# Altium PCB Pcb_mppt_board.PcbDoc
Units mm, origin at the board's own origin, x right, y up, seen from the top; angles counter-clockwise.
Board outline 100 x 98 mm, 2 copper layers (Top Layer, Bottom Layer); 7 components, 3 nets, 40 pads, 221 vias.
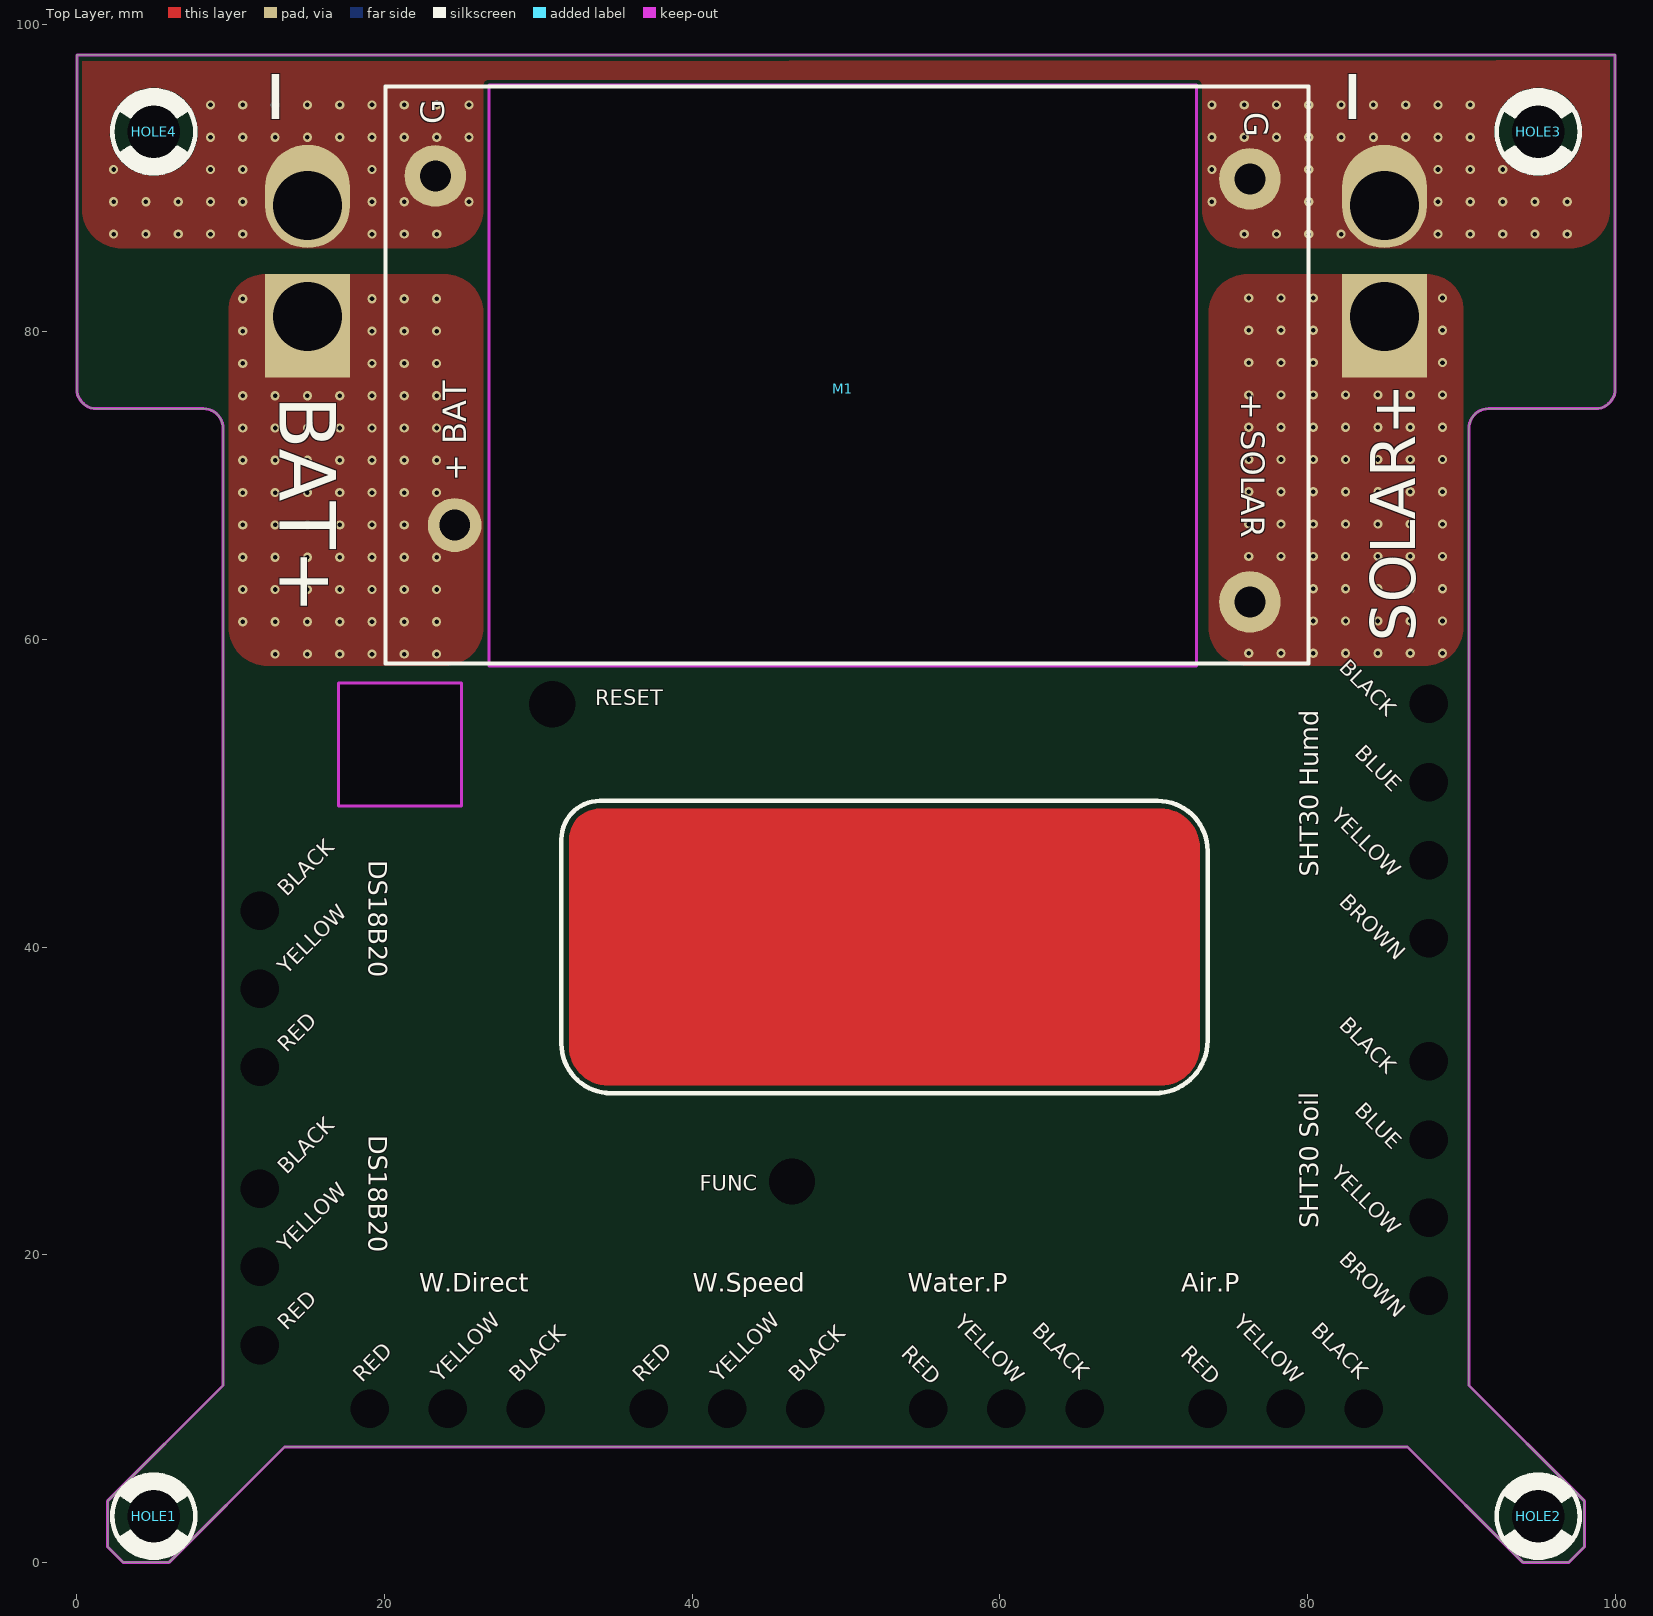
[diagram p0: Top Layer view]
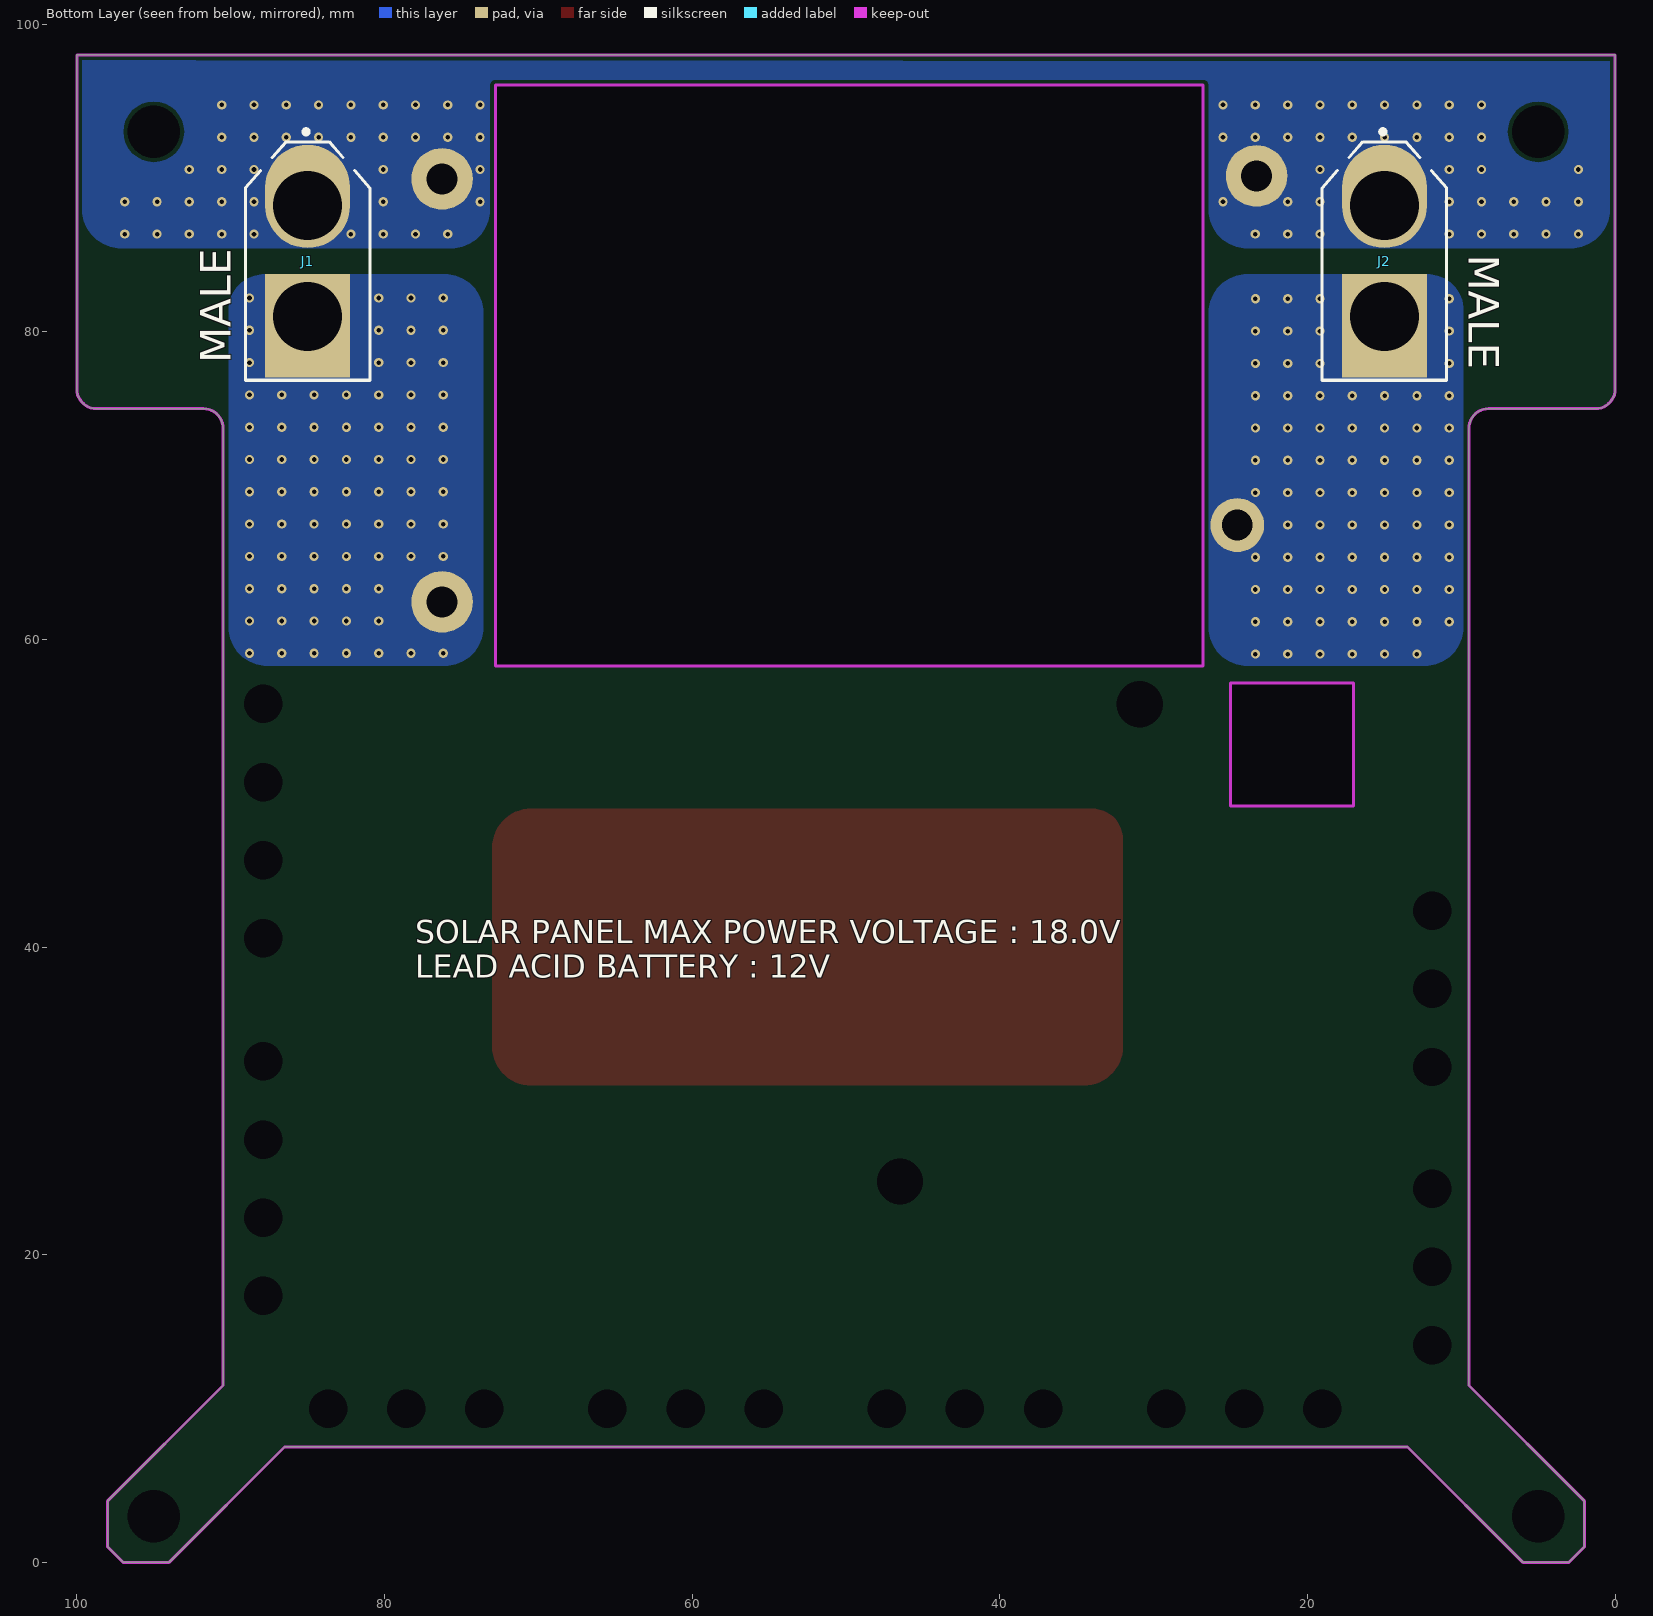
[diagram p1: Bottom Layer view, seen from below]

## Layer stack, top to bottom
Top Solder: solder mask 0.0102, Solder Resist, Dk 3.5
Top Layer: signal copper 0.0356
Dielectric 1: dielectric 0.32, FR-4, Dk 4.8
Bottom Layer: signal copper 0.0356
Bottom Solder: solder mask 0.0102, Solder Resist, Dk 3.5

## Board outline
2,1 3,0 6,0 13.5,7.5 86.5,7.5 94,0 97,0 98,1 98,4 90.5,11.5 90.5,73.73 cw(c91.77,73.73) 91.77,75 98.73,75 ccw(c98.73,76.27) 100,76.27 100,98 0,98 0,76.27 ccw(c1.27,76.27) 1.27,75 8.23,75 cw(c8.23,73.73) 9.5,73.73 9.5,11.5 2,4
cut-out: 17.002,57.165 17.002,49.165 25.002,49.165 25.002,57.165
cut-out: 26.786,96.032 26.786,58.282 72.786,58.282 72.786,96.032

## Design rules (kind name [scope] priority, off if disabled: settings)
Clearance [All] p1: gap=0.254 ignorepadtopadclearanceinfootprint=FALSE except(0: Arc-Hole Track-Hole SMDPad-Hole THPad-Hole Via-Hole Fill-Hole Poly-Hole Region-Hole Text-Hole)
PolygonConnect [All] p1: connectstyle=Direct reliefconductorwidth=0.254 reliefentries=4 polygonreliefangle="90 Angle" airgapwidth=0.254
RoutingVias [All] p1: holewidth=0.3 width=0.3 viastyle="Through Hole" minholewidth=0.3 minwidth=0.3 maxholewidth=0.3 maxwidth=0.3
SolderMaskExpansion [All] p1: expansion=0.102
Width [All] p1: maxlimit=0.254 minlimit=0.254 preferedwidth=0.254
30 further rules are at their usual default settings.

## Classes and differential pairs
component class Sch_mppt_board: J1 J2

## Components (designator, comment, footprint, x,y, rotation, side; value= is the part's Value field where it differs from the comment)
HOLE1 "HOLE" "HOLE M3" 5,3 r0 top
HOLE2 "HOLE" "HOLE M3" 95,3 r0 top
HOLE3 "HOLE" "HOLE M3" 95,93 r0 top
HOLE4 "HOLE" "HOLE M3" 5,93 r0 top
J1 "XT60-M" XT60-M 85,84.6 r270 bottom
J2 "XT60-M" XT60-M 15,84.6 r270 bottom
M1 "MPPT 5A Module" "MODULE MPPT 5A BQ24650" 49.786,76.282 r180 top

## Footprints (in the part's own frame and the unit in brackets; to place one, negate y for a bottom-side part, rotate by r counter-clockwise, add the part's x,y. Pads: shape width x height; smd on the part's side, far side on the other; paste and mask are expansions set on the pad)
"HOLE M3" [mm]
  round 3.2 hole 3.4 mask+0.1: 1(0,0)
  Top Layer pour cut-out: -2.846,0.006 -2.628,1.101 -2.007,2.029 -1.077,2.646 0.019,2.859 0.019,2.859 1.117,2.635 2.042,2.003 2.649,1.062 2.845,-0.041 2.845,-0.041 2.628,-1.12 2.013,-2.033 1.094,-2.64 0.012,-2.845 0.012,-2.845 -1.086,-2.638 -2.017,-2.021 -2.636,-1.091 -2.846,0.006
  silkscreen extent -2.7,-2.7 2.7,2.7, body extent -2.5,-2.5 2.5,2.5, height 1.73
"MODULE MPPT 5A BQ24650" [mm]
  round 4 hole 2: 1(-26.475,13.848) 2(-26.475,-13.652) 4(26.475,-13.848)
  round 3.5 hole 2: 3(25.225,8.852)
  Keep-Out Layer lines w0.2: 23,18 23,-19.75 -23,-19.75 -23,18 23,18
  silkscreen extent -30.27,-19.65 29.73,17.85, body extent -30.28,-19.66 29.72,17.83, height 2.73
XT60-M [mm]
  oval 6.716x5.516 hole 4.5 copper offset -0.6,0: 1(-3.6,0)
  rect 6.716x5.516 hole 4.5 copper offset 0.6,0: 2(3.6,0)
  silkscreen extent -8.55,-4.05 7.75,4.05, body extent -8,-3.99 8,4.01, height 16.1

## Part data
HOLE1 HOLE2 HOLE3 HOLE4: library part "HOLE M3"
J1 J2: Package="Package Analog Devices", Availability=Unavailable, MF=AMASS, MP=XT60-M, Price=None, SnapEDA_Link=https://www.snapeda.com/parts/XT60-M/AMASS/view-part/?ref=snap
M1: library part "Module BQ24650 MPPT 5A", "Module Solar Charge MPPT 5A"

## Free pads (board coordinates)
  round 0 hole 2.5: 2(11.88,14.123) 2(11.88,19.203) 2(11.88,24.283) 2(11.88,32.203) 2(11.88,37.283) 2(11.88,42.363) 2(19.028,10) 2(24.108,10) 2(29.188,10) 2(37.188,10) 2(42.268,10) 2(47.348,10) 2(55.348,10) 2(60.428,10) 2(65.508,10) 2(73.508,10) 2(78.588,10) 2(83.668,10) 2(87.88,17.324) 2(87.88,22.404) 2(87.88,27.484) 2(87.88,32.564) 2(87.88,40.564) 2(87.88,45.644) 2(87.88,50.724) 2(87.88,55.804)
  round 0 hole 3: 2(30.908,55.789) 2(46.5,24.75)

## Via types
v1: diameter 0.6, hole 0.3, Top Layer to Bottom Layer, tented both sides, 221 vias

## Nets (pads, with @x,y where several pads share a name; then routed paths per layer and width w, separated by ;. In a path a pad name is that pad's centre, name@x,y a point inside that pad or via, vN(x,y) a via of type N, cw(c..) or ccw(c..) an arc to the next point about the centre after c; other vN are vias at no path point)
NetJ1_1: J1.1 J2.1 M1.2 M1.4
  other v1: 2.388,86.35 4.488,86.35 6.588,86.35 8.688,86.35 10.788,86.35 19.188,86.35 21.288,86.35 23.388,86.35 75.888,86.35 77.988,86.35 80.088,86.35 82.188,86.35 88.488,86.35 90.588,86.35 92.688,86.35 94.788,86.35 96.888,86.35 2.388,88.45 4.488,88.45 6.588,88.45 8.688,88.45 10.788,88.45 19.188,88.45 21.288,88.45 25.488,88.45 73.788,88.45 80.088,88.45 88.488,88.45 90.588,88.45 92.688,88.45 94.788,88.45 96.888,88.45 2.388,90.55 8.688,90.55 10.788,90.55 19.188,90.55 73.788,90.55 80.088,90.55 88.488,90.55 90.588,90.55 92.688,90.55 8.688,92.65 10.788,92.65 12.888,92.65 14.988,92.65 17.088,92.65 19.188,92.65 21.288,92.65 23.388,92.65 25.488,92.65 73.788,92.65 75.888,92.65 77.988,92.65 80.088,92.65 82.188,92.65 84.288,92.65 86.388,92.65 88.488,92.65 90.588,92.65 8.688,94.75 10.788,94.75 12.888,94.75 14.988,94.75 17.088,94.75 19.188,94.75 21.288,94.75 23.388,94.75 25.488,94.75 73.788,94.75 75.888,94.75 77.988,94.75 80.088,94.75 82.188,94.75 84.288,94.75 86.388,94.75 88.488,94.75 90.588,94.75
NetJ1_2: J1.2 M1.1
  other v1: 76.181,59.094 78.281,59.094 80.381,59.094 82.481,59.094 84.581,59.094 86.681,59.094 88.781,59.094 80.381,61.194 82.481,61.194 84.581,61.194 86.681,61.194 88.781,61.194 80.381,63.294 82.481,63.294 84.581,63.294 86.681,63.294 88.781,63.294 76.181,65.394 78.281,65.394 80.381,65.394 82.481,65.394 84.581,65.394 86.681,65.394 88.781,65.394 76.181,67.494 78.281,67.494 80.381,67.494 82.481,67.494 84.581,67.494 86.681,67.494 88.781,67.494 76.181,69.594 78.281,69.594 80.381,69.594 82.481,69.594 84.581,69.594 86.681,69.594 88.781,69.594 76.181,71.694 78.281,71.694 80.381,71.694 82.481,71.694 84.581,71.694 86.681,71.694 88.781,71.694 76.181,73.794 78.281,73.794 80.381,73.794 82.481,73.794 84.581,73.794 86.681,73.794 88.781,73.794 76.181,75.894 78.281,75.894 80.381,75.894 82.481,75.894 84.581,75.894 86.681,75.894 88.781,75.894 76.181,77.994 78.281,77.994 80.381,77.994 88.781,77.994 76.181,80.094 78.281,80.094 80.381,80.094 88.781,80.094 76.181,82.194 78.281,82.194 80.381,82.194 88.781,82.194
NetJ2_2: J2.2 M1.3
  other v1: 12.887,59.044 14.987,59.044 17.087,59.044 19.187,59.044 21.287,59.044 23.387,59.044 10.787,61.144 12.887,61.144 14.987,61.144 17.087,61.144 19.187,61.144 21.287,61.144 23.387,61.144 10.787,63.244 12.887,63.244 14.987,63.244 17.087,63.244 19.187,63.244 21.287,63.244 23.387,63.244 10.787,65.344 12.887,65.344 14.987,65.344 17.087,65.344 19.187,65.344 21.287,65.344 23.387,65.344 10.787,67.444 12.887,67.444 14.987,67.444 17.087,67.444 19.187,67.444 21.287,67.444 10.787,69.544 12.887,69.544 14.987,69.544 17.087,69.544 19.187,69.544 21.287,69.544 23.387,69.544 10.787,71.644 12.887,71.644 14.987,71.644 17.087,71.644 19.187,71.644 21.287,71.644 23.387,71.644 10.787,73.744 12.887,73.744 14.987,73.744 17.087,73.744 19.187,73.744 21.287,73.744 23.387,73.744 10.787,75.844 12.887,75.844 14.987,75.844 17.087,75.844 19.187,75.844 21.287,75.844 23.387,75.844 10.787,77.944 19.187,77.944 21.287,77.944 23.387,77.944 10.787,80.044 19.187,80.044 21.287,80.044 23.387,80.044 10.787,82.144 19.187,82.144 21.287,82.144 23.387,82.144
pads on no net: HOLE1.1 HOLE2.1 HOLE3.1 HOLE4.1

## Polygon pours and split planes (outlines as drawn)
NetJ1_2 on Top Layer "Top Layer-NetJ1_2" (solid, pour order 26): 90.139,81.362 ccw(c87.757,81.362) 87.757,83.744 76.124,83.744 ccw(c76.124,81.204) 73.584,81.204 73.584,60.822 ccw(c76.124,60.822) 76.124,58.282 87.599,58.282 ccw(c87.599,60.822) 90.139,60.822
NetJ2_2 on Top Layer "Top Layer-NetJ2_2" (solid, pour order 22): 9.861,81.362 cw(c12.243,81.362) 12.243,83.744 23.876,83.744 cw(c23.876,81.204) 26.416,81.204 26.416,60.822 cw(c23.876,60.822) 23.876,58.282 12.401,58.282 cw(c12.401,60.822) 9.861,60.822
NetJ1_1 on Top Layer "Top Layer-NetJ1_1" (solid, pour order 10): 0.361,97.593 0.361,87.96 ccw(c2.901,87.96) 2.901,85.42 23.876,85.42 ccw(c23.876,87.96) 26.416,87.96 26.416,93.32 73.147,93.32 73.147,87.96 ccw(c75.687,87.96) 75.687,85.42 97.099,85.42 ccw(c97.099,87.96) 99.639,87.96 99.639,97.643
NetJ1_2 on Bottom Layer "Bottom Layer-NetJ1_2" (solid, pour order 24): 90.139,81.362 ccw(c87.757,81.362) 87.757,83.744 76.124,83.744 ccw(c76.124,81.204) 73.584,81.204 73.584,60.822 ccw(c76.124,60.822) 76.124,58.282 87.599,58.282 ccw(c87.599,60.822) 90.139,60.822
NetJ2_2 on Bottom Layer "Bottom Layer-NetJ2_2" (solid, pour order 20): 9.861,81.362 cw(c12.243,81.362) 12.243,83.744 23.876,83.744 cw(c23.876,81.204) 26.416,81.204 26.416,60.822 cw(c23.876,60.822) 23.876,58.282 12.401,58.282 cw(c12.401,60.822) 9.861,60.822
NetJ1_1 on Bottom Layer "Bottom Layer-NetJ1_1" (solid, pour order 8): 0.361,97.593 0.361,87.96 ccw(c2.901,87.96) 2.901,85.42 23.876,85.42 ccw(c23.876,87.96) 26.416,87.96 26.416,93.32 73.147,93.32 73.147,87.96 ccw(c75.687,87.96) 75.687,85.42 97.099,85.42 ccw(c97.099,87.96) 99.639,87.96 99.639,97.643

## Keep-outs
Keep-Out Layer:
  lines w0.2: 0,76.27 ccw(c1.27,76.27) 1.27,75 8.23,75 cw(c8.23,73.73) 9.5,73.73 9.5,11.5 2,4 2,1 3,0 6,0 13.5,7.5 86.5,7.5 94,0 97,0 98,1 98,4 90.5,11.5 90.5,73.73 cw(c91.77,73.73) 91.77,75 98.73,75 ccw(c98.73,76.27) 100,76.27 100,98 0,98 0,76.27 ; 17.002,49.165 17.002,57.165 25.002,57.165 25.002,49.165 17.002,49.165 ; 26.786,58.282 26.786,96.032 72.786,96.032 72.786,58.282 26.786,58.282

## Other copper
Top Layer:
  region: 34,49 ccw(c34,47) 32,47 32,33.54 ccw(c34.54,33.54) 34.54,31 70.46,31 ccw(c70.46,33.54) 73,33.54 73,46.46 ccw(c70.46,46.46) 70.46,49

## Silkscreen, mask and mechanical layers (free items; w line width, h text height)
Top Overlay:
  lines w0.3: 31.5,33.725 ccw(c34.725,33.725) 34.725,30.5 70.08,30.5 ccw(c70.08,33.928) 73.508,33.928 73.508,46.258 ccw(c70.266,46.258) 70.266,49.5 34.5,49.5 34,49.5 ccw(c34,47) 31.5,47 31.5,33.725
  text "I" at 12.188,92.65 h6.3
  text "I" at 82.188,92.65 h6.3
  text "BAT+" at 12,75.844 h6.3 r270
  text "SOLAR+" at 87.982,59.845 h5 r90
  text "BLACK" at 81.997,58.1 h1 r315
  text "RESET" at 33.702,55.705 h1
  text "BLUE" at 82.997,52.52 h1 r315
  text "YELLOW" at 81.497,48.44 h1 r315
  text "DS18B20" at 18.962,45.644 h1.2 r270
  text "SHT30 Humd" at 80.692,44.585 h1.2 r90
  text "BLACK" at 13.63,43.253 h1 r45
  text "BROWN" at 81.997,42.86 h1 r315
  text "YELLOW" at 13.63,38.173 h1 r45
  text "BLACK" at 81.997,34.86 h1 r315
  text "RED" at 13.63,33.093 h1 r45
  text "BLUE" at 82.997,29.28 h1 r315
  text "DS18B20" at 18.962,27.765 h1.2 r270
  text "YELLOW" at 81.497,25.2 h1 r315
  text "BLACK" at 13.63,25.173 h1 r45
  text "FUNC" at 40.5,24.16 h1
  text "SHT30 Soil" at 80.692,21.725 h1.2 r90
  text "YELLOW" at 13.63,20.093 h1 r45
  text "BROWN" at 81.997,19.62 h1 r315
  text "W.Direct" at 22.272,17.605 h1.2
  text "W.Speed" at 40.052,17.605 h1.2
  text "Water.P" at 54.022,17.605 h1.2
  text "Air.P" at 71.802,17.605 h1.2
  text "YELLOW" at 56.989,15.5 h1 r315
  text "YELLOW" at 75.149,15.5 h1 r315
  text "RED" at 13.63,15.013 h1 r45
  text "BLACK" at 62.028,15 h1 r315
  text "BLACK" at 80.188,15 h1 r315
  text "RED" at 53.528,13.5 h1 r315
  text "RED" at 71.688,13.5 h1 r315
  text "RED" at 18.549,11.627 h1 r45
  text "YELLOW" at 23.629,11.627 h1 r45
  text "BLACK" at 28.709,11.627 h1 r45
  text "RED" at 36.709,11.627 h1 r45
  text "YELLOW" at 41.789,11.627 h1 r45
  text "BLACK" at 46.869,11.627 h1 r45
Bottom Overlay:
  text "MALE" at 9.5,85 h2 r90
  text "MALE" at 90,77.944 h2 r270
  text "SOLAR PANEL MAX POWER VOLTAGE : 18.0V / LEAD ACID BATTERY : 12V" at 77.988,38 h1.5
Top Solder:
  drawing of 802 lines, arcs and shapes, not listed
  text "SOLAR CHARGER V1.0 / Model: SENO_V10 / QTech Vietnam / 09/2019 / fps.qtechvietnam@gmail.com" at 34,33 h1.5

## Text inside footprints (layer, text, board x,y; h text height)
M1: Top Overlay "+ BAT" at 25.301,70.288 h1.52 r90; Top Overlay "+ SOLAR" at 75.694,76.003 h1.52 r270; Top Overlay "G" at 23.878,93.503 h1.52 r90; Top Overlay "G" at 75.923,94.265 h1.52 r270